# Altium PCB RC_CAR.PcbDoc
Units mm, origin at the board's own origin, x right, y up, seen from the top; angles counter-clockwise.
Board outline 49.71 x 36.04 mm, 2 copper layers (Top Layer, Bottom Layer); 31 components, 33 nets, 98 pads, 82 vias.
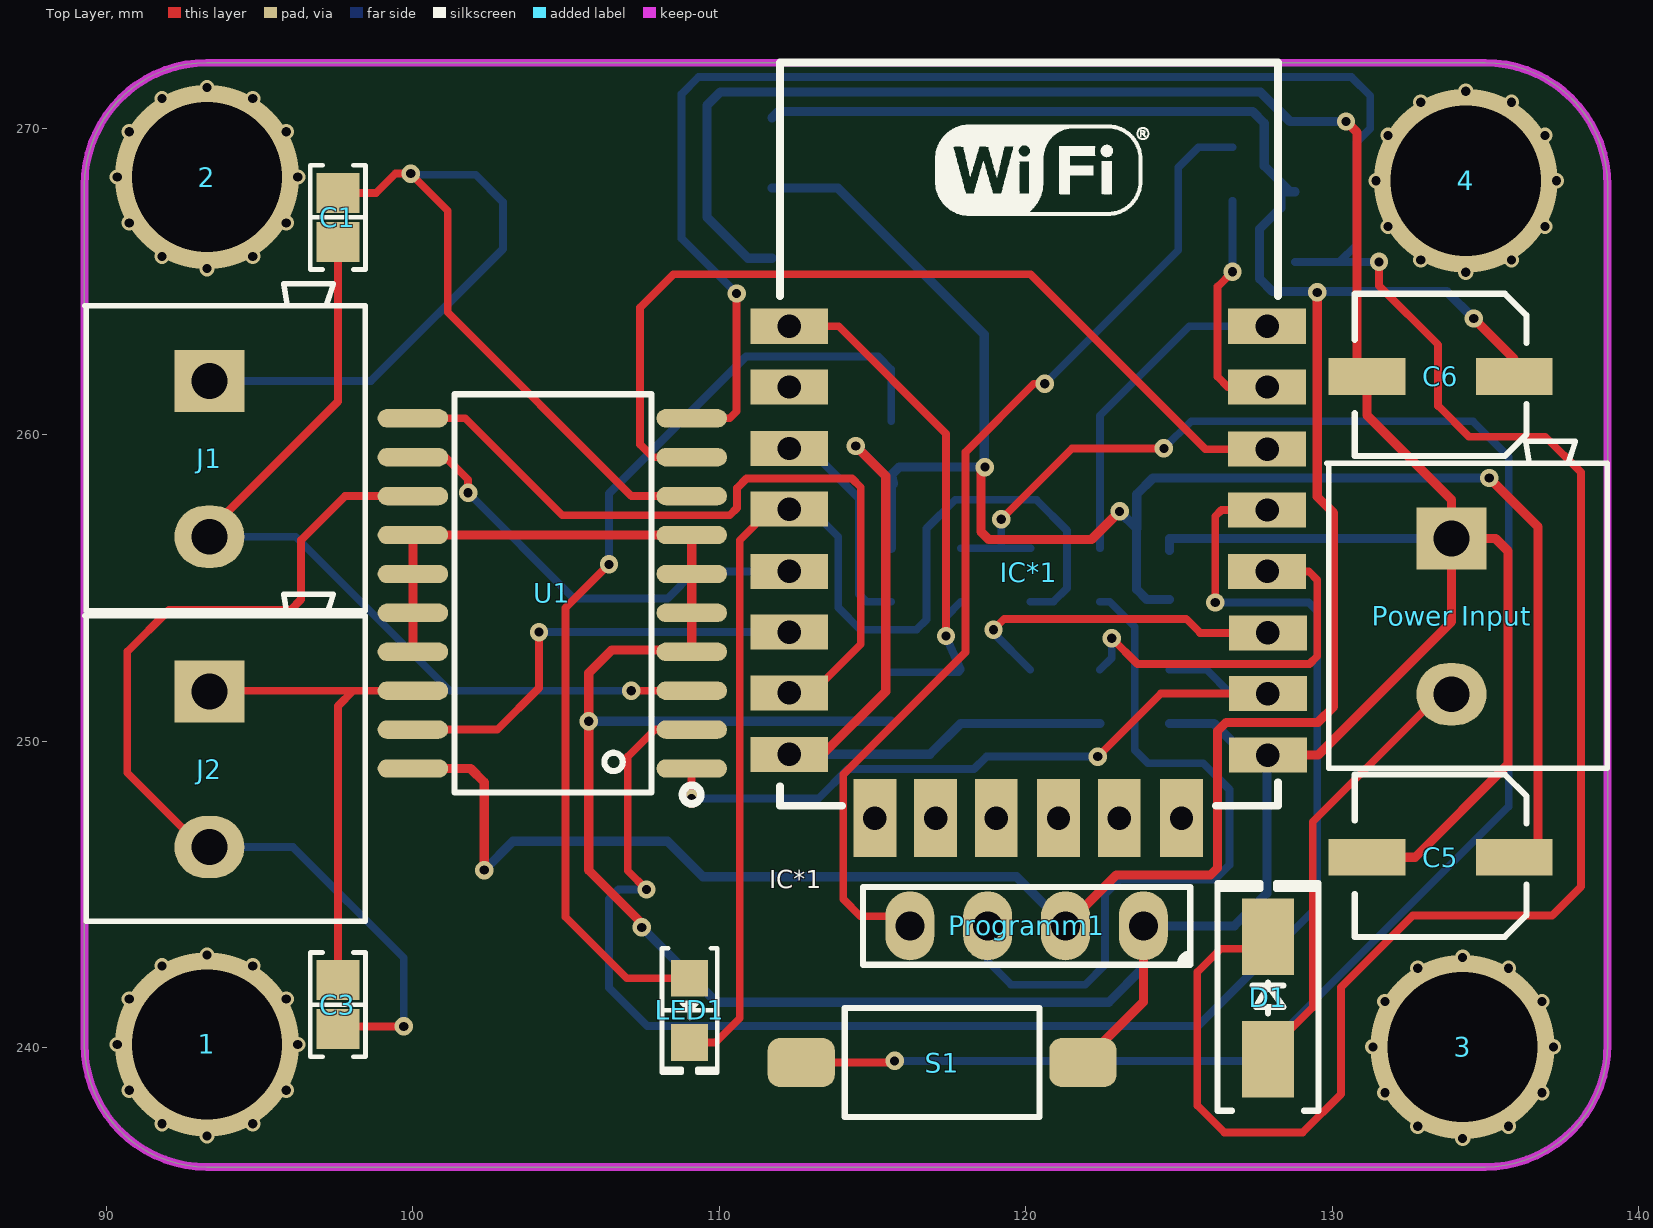
[diagram p0: Top Layer view]
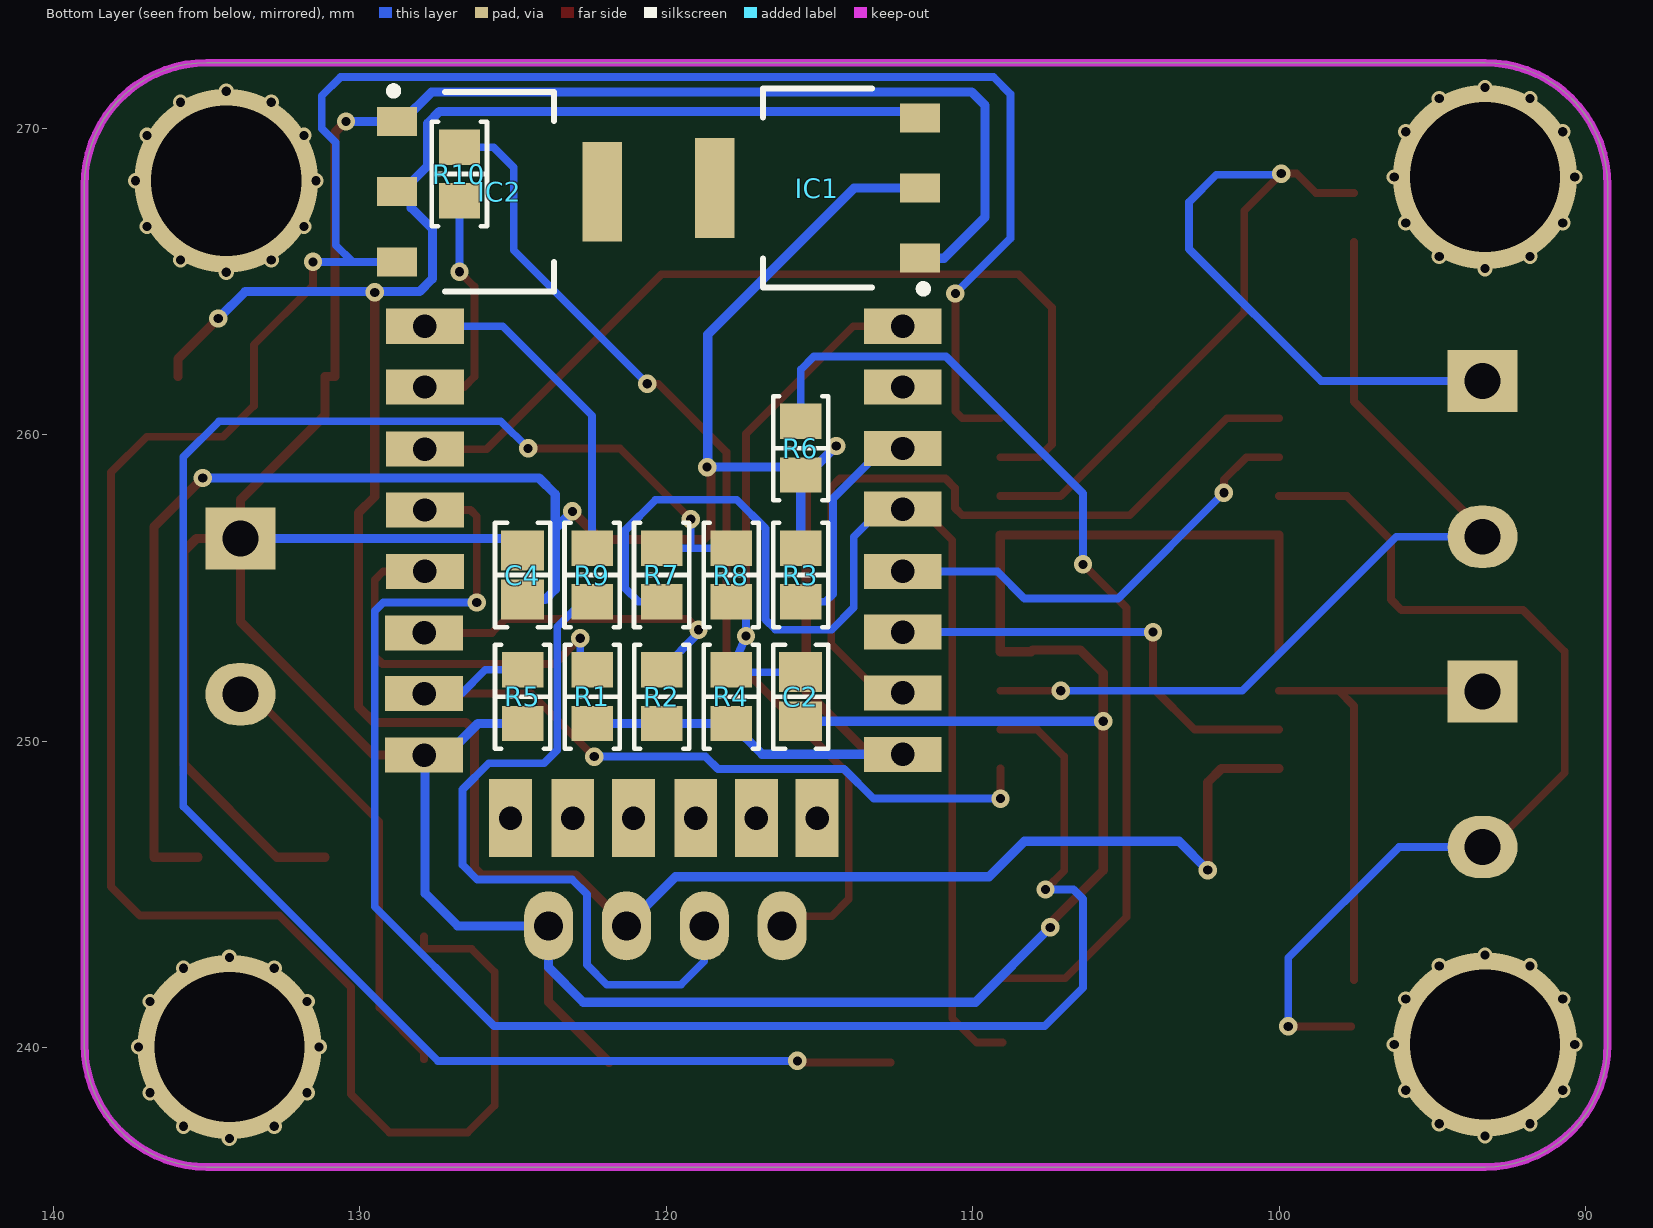
[diagram p1: Bottom Layer view, seen from below]
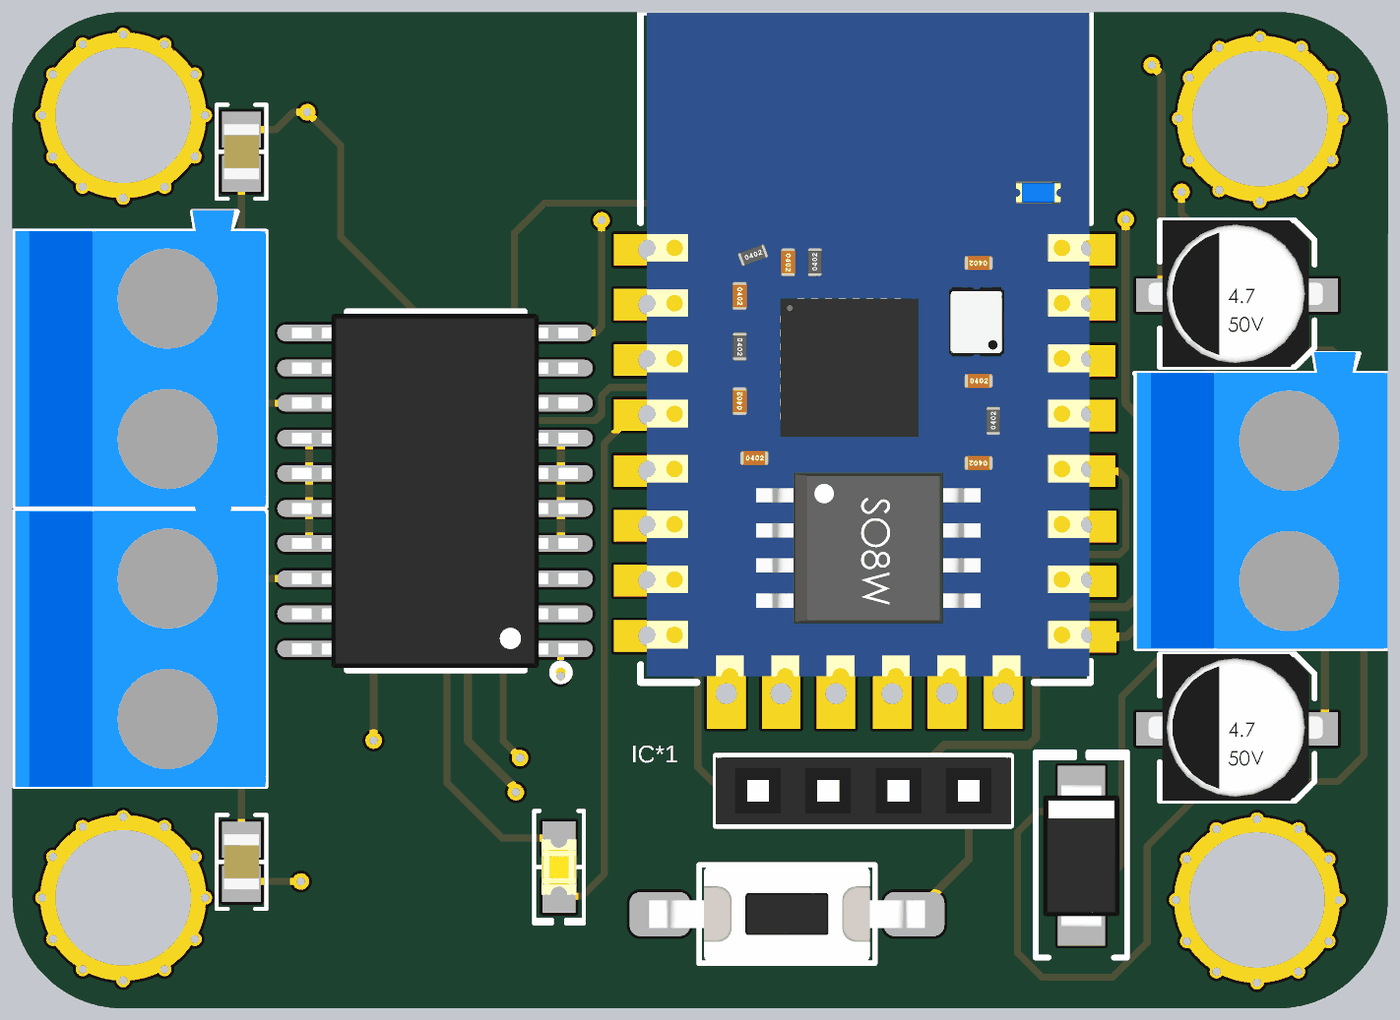
[diagram p2: 3D render of the assembled board from above, using the file's embedded part models]
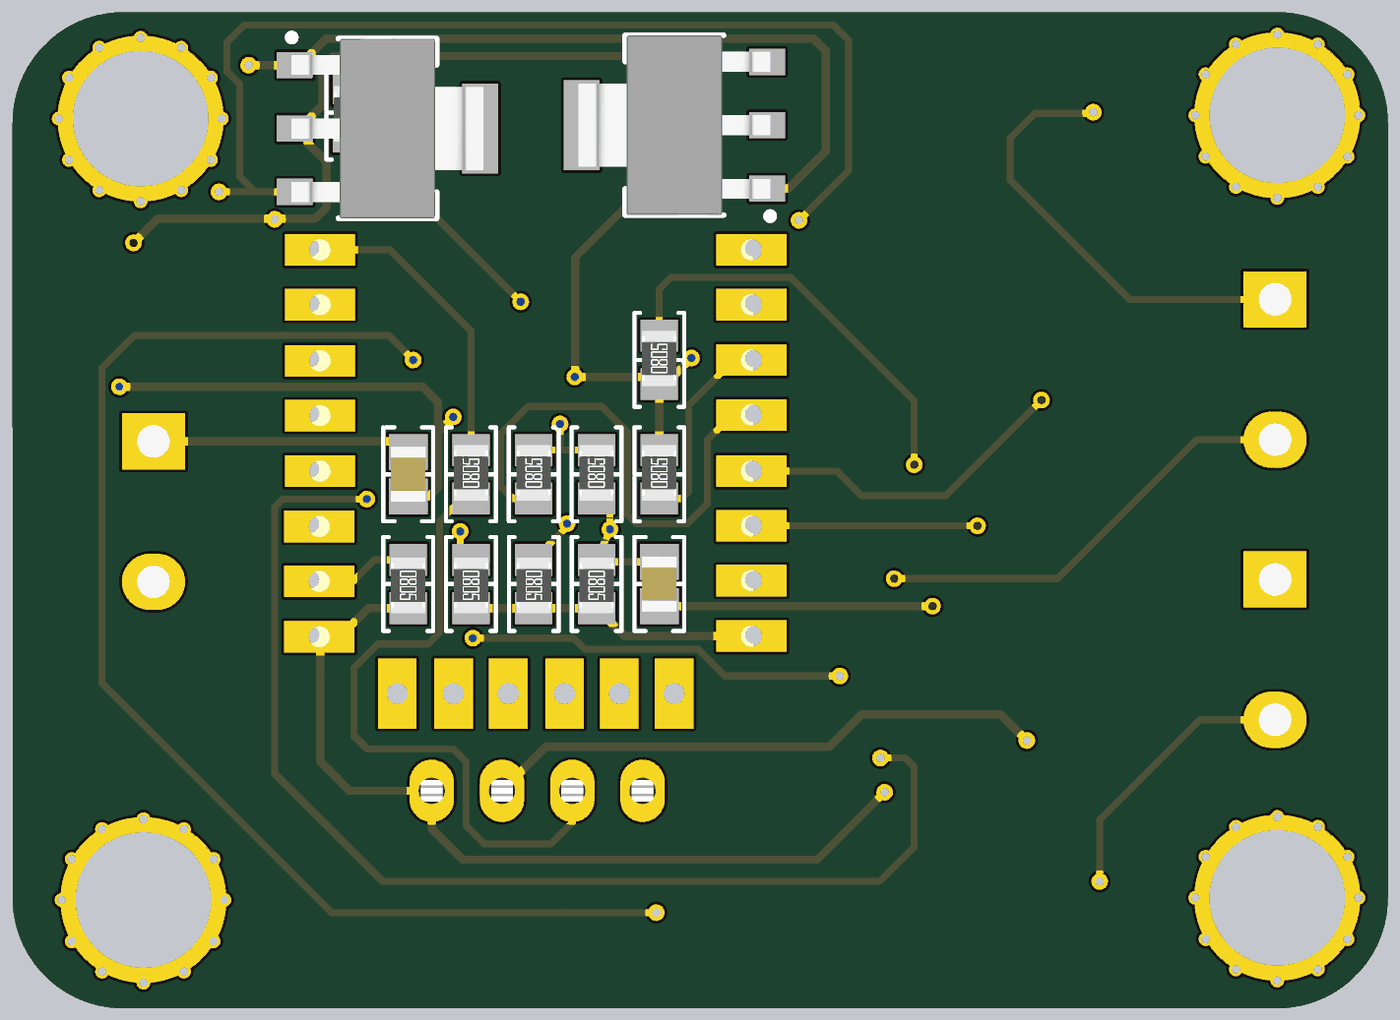
[diagram p3: 3D render of the assembled board from below, using the file's embedded part models]

## Layer stack, top to bottom
Top Solder: solder mask 0.0102, Solder Resist, Dk 3.5
Top Layer: signal copper 0.0356
Dielectric 1: dielectric 0.32, FR-4, Dk 4.8
Bottom Layer: signal copper 0.0356
Bottom Solder: solder mask 0.0102, Solder Resist, Dk 3.5

## Board outline
89.281,240.11 89.281,268.15 cw(c93.281,268.15) 93.281,272.15 134.99,272.15 cw(c134.99,268.15) 138.99,268.15 138.99,240.11 cw(c134.99,240.11) 134.99,236.11 93.281,236.11 cw(c93.281,240.11)

## Design rules (kind name [scope] priority, off if disabled: settings)
Clearance [All] p1: gap=0.2 ignorepadtopadclearanceinfootprint=FALSE
PolygonConnect [All] p1: connectstyle=Relief reliefconductorwidth=0.254 reliefentries=4 polygonreliefangle="90 Angle" airgapwidth=0.254
RoomDefinition RC_CAR [InComponentClass('RC_CAR')] p1: confinementstyle=ConfineIn formatcopy=TRUE lockcomponents=FALSE outline 124.943,58.154 144.247,58.154 144.247,75.807 124.943,75.807
RoutingVias [All] p1: holewidth=0.3 width=0.6 viastyle="Through Hole" minholewidth=0.3 minwidth=0.6 maxholewidth=0.3 maxwidth=0.6
SMDNeckDown [All] p1: percent=50.000
SolderMaskExpansion [All] p1: expansion=0.102
UnConnectedPin [All] p1:
UnRoutedNet [All] p1: checkbadconnections=TRUE
Width [InNet('GND')] p1: maxlimit=0.3 minlimit=0.3 preferedwidth=0.3
Width Width_1 [InNet('VDD5V')] p2: maxlimit=0.3 minlimit=0.3 preferedwidth=0.3
Width Width_2 [InNet('VDD3V3')] p3: maxlimit=0.3 minlimit=0.3 preferedwidth=0.3
Width Width_3 [InNet('No Net')] p4: maxlimit=0.2 minlimit=0.2 preferedwidth=0.2
29 further rules are at their usual default settings.

## Components (designator, comment, footprint, x,y, rotation, side; value= is the part's Value field where it differs from the comment)
1 "Lego" "Lego Hole" 93.281,240.11 r90 top
2 "Lego" "Lego Hole" 93.281,268.417 r90 top
3 "Lego" "Lego Hole" 134.26,240.03 r90 top
4 "Lego" "Lego Hole" 134.36,268.297 r90 top
C1 "100nF" "CAP 0805/2012" 97.554,267.1 r270 top value=0.1uF
C2 "470pF" "CAP 0805/2012" 115.615,251.46 r90 bottom value=0.1uF
C3 "100nF" "CAP 0805/2012" 97.554,241.41 r270 top value=0.1uF
C4 "100nF" "CAP 0805/2012" 124.69,255.43 r270 bottom value=0.1uF
C5 "100uF" "CAP ALUM 5MM" 133.74,246.22 r180 top value=10uF
C6 "10uF" "CAP ALUM 5MM" 133.74,261.91 r180 top
D1 "1N5819/SS14/S4" "DO214AC SMA" 127.91,241.63 r90 top
IC1 "AMS1117 - 3.3V" AMS1117 115.07,268.06 r0 bottom
IC2 "AMS1117 - 5V" AMS1117 125.44,267.94 r180 bottom
IC*1 "ESP8266 ESP-12-E" "ESP8266 ESP-12-E" 128.87,247.14 r0 top
J1 "2 Pin" Socket_Blue_2 93.361,259.22 r270 top
J2 "2 Pin" Socket_Blue_2 93.361,249.09 r270 top
LED1 "RED" "LED 0805/2012 YELLOW" 109.03,241.22 r270 top value=Green
"Power Input" "2 Pin" Socket_Blue_2 133.896,254.08 r270 top
Programm1 "4 Pin" "SAMTEC SSW-104-03-T-S" 120.03,243.98 r180 top
R1 "12K" "RES 0805/2012" 122.42,251.46 r270 bottom value=1K
R2 "12K" "RES 0805/2012" 120.15,251.46 r270 bottom value=1K
R3 "12K" "RES 0805/2012" 115.615,255.43 r90 bottom value=1K
R4 "12K" "RES 0805/2012" 117.88,251.46 r270 bottom value=1K
R5 "12K" "RES 0805/2012" 124.69,251.46 r270 bottom value=1K
R6 "470R" "RES 0805/2012" 115.615,259.57 r90 bottom value=1K
R7 "0(NC)" "RES 0805/2012" 120.152,255.43 r90 bottom value=1K
R8 "470R" "RES 0805/2012" 117.884,255.43 r90 bottom value=1K
R9 "470R" "RES 0805/2012" 122.421,255.43 r90 bottom value=1K
R10 "470R" "RES 0805/2012" 126.75,268.517 r270 bottom value=1K
S1 "But 2 PIN" "TE FSMSMTR" 117.27,239.52 r90 top
U1 "L293DD" SOIC127P1030-20N 104.55,254.83 r180 top

## Footprints (in the part's own frame and the unit in brackets; to place one, negate y for a bottom-side part, rotate by r counter-clockwise, add the part's x,y. Pads: shape width x height; smd on the part's side, far side on the other; paste and mask are expansions set on the pad)
AMS1117 [mm]
  rect 1.3x0.95 smd: 1(-3.35,2.29) 2(-3.35,0) 3(-3.35,-2.29)
  rect 1.3x3.25 smd: ""(3.35,0)
  silkscreen extent -3.58,-3.25 1.78,3.41, body extent -3.47,-3.25 3.47,3.25, height 1.64
"CAP 0805/2012" [mm] "Chip Capacitor, 2-Leads, Body 2.00x1.20mm, IPC Medium Density"
  rect 1.3x1.4 smd: 1(-0.8,0) 2(0.8,0)
  silkscreen extent -1.7,-0.9 1.7,0.9, body extent -1,-0.64 1,0.64, height 1.26
"CAP ALUM 5MM" [mm] "Aluminum Electrolytic Capacitor, Body 6.60x6.60x7.70mm, IPC Low Density"
  rect 2.5x1.2 smd: 1(-2.2,0) 2(2.6,0)
  silkscreen extent -2.6,-2.7 3,2.6, body extent -2.9,-2.7 3.4,2.6, height 5.7
"DO214AC SMA" [mm] "Molded Diode, 2-Leads, Body 4.30x2.60mm, IPC Medium Density"
  rect 2.5x1.7 smd: 1(-2,0) 2(2,0)
  silkscreen extent -3.68,-1.65 3.75,1.65, body extent -2.6,-1.37 2.6,1.37, height 2.4
"ESP8266 ESP-12-E" [mil] "ESP8266 ESP-12-E"
  rect 100x45 hole 30: 1(-653,646) 2(-653,568) 3(-653,489) 4(-653,411) 5(-653,331) 6(-653,253) 7(-653,175) 8(-653,96) 15(-38,95) 16(-38,174) 17(-38,252) 18(-39,331) 19(-39,410) 20(-39,488) 21(-39,568) 22(-39,646)
  rect 55x100 hole 30: 9(-543,14) 10(-465,14) 11(-387,14) 12(-307,14) 13(-229,14) 14(-149,14)
  silkscreen extent -665,30 -25,985, body extent -656,39 -26,983
"LED 0805/2012 YELLOW" [mm] "Chip Diode, 2-Leads, Body 2.00x1.25mm, IPC Medium Density"
  rect 1.2x1.2 smd: 1(-1.05,0) 2(1.05,0)
  silkscreen extent -2.03,-0.9 2.03,0.9, body extent -1,-0.62 1,0.63, height 0.9
"Lego Hole" [mm]
"RES 0805/2012" [mm] "Chip Resistor, 2-Leads, Body 2.00x1.25mm, IPC Medium Density"
  rect 1.15x1.35 smd: 1(-0.875,0) 2(0.875,0)
  silkscreen extent -1.7,-0.9 1.7,0.9, body extent -0.95,-0.62 1.05,0.63, height 0.6
"SAMTEC SSW-104-03-T-S" [mm]
  oval 1.6x2.25 hole 0.95: 1(-3.81,0) 2(-1.27,0) 3(1.27,0) 4(3.81,0)
  silkscreen extent -5.34,-1.27 5.34,1.27, body extent -5.33,-1.21 5.33,1.21, height 8.51
Socket_Blue_2 [mil]
  rect 80x90 hole 46: 1(-100,0)
  oval 80x90 hole 46: 2(100,0)
  silkscreen extent -225,-160 195,200, body extent -227,-157 195,200, height 493
SOIC127P1030-20N [mm] "SOIC, 20-Leads, Body 12.8x7.5mm, Pitch 1.27mm, IPC Medium Density"
  oval 2.3x0.6 smd: 1(-4.55,5.715) 2(-4.55,4.445) 3(-4.55,3.175) 4(-4.55,1.905) 5(-4.55,0.635) 6(-4.55,-0.635) 7(-4.55,-1.905) 8(-4.55,-3.175) 9(-4.55,-4.445) 10(-4.55,-5.715) 11(4.55,-5.715) 12(4.55,-4.445) 13(4.55,-3.175) 14(4.55,-1.905) 15(4.55,-0.635) 16(4.55,0.635) 17(4.55,1.905) 18(4.55,3.175) 19(4.55,4.445) 20(4.55,5.715)
  silkscreen extent -4.85,-6.5 3.19,6.86, body extent -5.16,-6.4 5.16,6.4, height 2.65
"TE FSMSMTR" [mm]
  rrect50% 1.6x2.19 smd: 1(0,4.595) 2(0,-4.595)
  silkscreen extent -1.78,-3.18 1.78,3.17, body extent -1.75,-4.98 1.75,4.98, height 4.42

## Part data
C1 C2 C3 C4: library part Capacitor, "SMT Capacitor"
C5 C6: library part "Polarised Capacitor", "SMT Polarised Capacitor"
D1: library part Diode, "Rectifier Diode"
IC1 IC2: library part AMS1117, Manufacturer_Name="Advanced Monolithic Systems", Manufacturer_Part_Number=ams1117-3.3v, Package=SOT229P700X180-4N, DeviceSetName=AMS1117-3.3V, GateName_1=G$1, Height=1.8mm, LibraryName=ams1117-3.3v, Supplier_Name=RS, SymbolName_1=AMS1117-3.3V
LED1: library part LED, "Chip LED"
R1 R2 R3 R4 R5 R6 R7 R8 R9 R10: library part Resistor, "SMT Resistor"
U1: "IC MOTOR DRIVER PAR 20-SOIC", Package="SOIC-20 STMicroelectronics", Availability=Good, MF=STMicroelectronics, MP=L293DD, Price="3.02 USD"

## Via types
v1: diameter 0.5, hole 0.3, Top Layer to Bottom Layer, 48 vias
v2: diameter 0.6, hole 0.3, Top Layer to Bottom Layer, 30 vias
v3: diameter 6, hole 4.9, Top Layer to Bottom Layer, 4 vias

## Nets (pads, with @x,y where several pads share a name; then routed paths per layer and width w, separated by ;. In a path a pad name is that pad's centre, name@x,y a point inside that pad or via, vN(x,y) a via of type N, cw(c..) or ccw(c..) an arc to the next point about the centre after c; other vN are vias at no path point)
ADC: IC*1.2
EN: IC*1.3 R3.1 | length 6.1
  Bottom Layer w0.254: IC*1.3@113.27,259.214 114.558,257.927 114.558,254.805 114.808,254.555 R3.1
GND: "Power Input.1" C2.1 C4.1 C5.2 C6.2 IC1.1 IC2.1 IC*1.15 Programm1.1 R5.2 S1.2 U1.4 U1.5 U1.6 U1.7 U1.14 U1.15 U1.16 U1.17 | length 154.3
  Top Layer w0.3: U1.17 U1.16 U1.15 U1.14 U1.7 U1.6 U1.5 U1.4 108.1,252.925 108.044,252.981 106.491,252.981 105.74,252.23 v2(105.74,250.66) 105.74,245.796 107.47,244.066 v2(107.47,243.93) ; S1.2 123.84,241.495 Programm1.1 ; IC*1.15 129.54,249.553 133.896,253.909 133.896,256.62 ; v2(130.454,270.23) 130.81,269.874 130.81,261.91 C6.2 131.14,260.642 133.896,257.886 133.896,256.62 ; C5.2 132.707,246.22 135.738,249.25 135.738,256.214 135.331,256.62 133.896,256.62
  Bottom Layer w0.3: v2(105.74,250.66) C2.1 ; v2(107.47,243.93) 109.91,241.49 122.709,241.49 123.84,242.621 Programm1.1 126.81,243.98 127.87,245.04 IC*1.15@127.87,249.553 ; IC1.1 110.937,265.77 109.6,267.107 109.6,270.76 110.036,271.196 127.66,271.196 128.626,270.23 IC2.1 v2(130.454,270.23) ; R5.2 126.145,250.585 127.155,249.575 127.87,249.575 IC*1.15@127.87,249.553 ; C4.1 124.69,256.62 133.896,256.62 ; IC*1.15 IC*1.15@127.87,249.553
GPIO0: IC*1.18 R1.1 | length 12.6
  Top Layer w0.254: v2(122.809,253.365) 123.647,252.527 129.261,252.527 129.515,252.781 129.515,255.268 129.235,255.547 IC*1.18
  Bottom Layer w0.254: R1.1 122.809,252.724 v2(122.809,253.365)
GPIO2: IC*1.17 R2.1 | length 11.1
  Top Layer w0.254: v2(118.948,253.644) 119.301,253.998 125.234,253.998 125.691,253.541 IC*1.17
  Bottom Layer w0.254: v2(118.948,253.644) 118.948,253.537 R2.1
GPIO4: IC*1.19 U1.2 | length 54.2
  Top Layer w0.254: v2(107.623,245.167) 107.01,245.78 107.01,249.504 107.891,250.385 U1.2 ; v2(126.187,254.533) 126.187,257.351 126.39,257.554 IC*1.19
  Bottom Layer w0.254: v2(107.623,245.167) 106.712,245.167 106.401,244.856 106.401,241.96 107.651,240.71 125.623,240.71 129.515,244.602 129.515,254.254 129.235,254.533 v2(126.187,254.533)
GPIO5: IC*1.20 U1.9 | length 29.6
  Top Layer w0.254: U1.9 107.831,259.275 107.417,259.69 107.417,264.16 108.504,265.247 120.158,265.247 125.87,259.535 IC*1.20
GPIO9: IC*1.11
GPIO10: IC*1.12
GPIO12: IC*1.6 U1.19 | length 14.7
  Top Layer w0.254: U1.19 102.755,250.385 104.115,251.745 v2(104.115,253.566)
  Bottom Layer w0.254: v2(104.115,253.566) IC*1.6
GPIO13: IC*1.7 U1.11 | length 25.2
  Top Layer w0.254: U1.11 101.705,260.545 104.872,257.378 110.338,257.378 110.577,257.617 110.577,258.267 110.89,258.58 114.33,258.58 114.62,258.29 114.62,253.17 113.36,251.91 113.36,251.585 IC*1.7
GPIO14: IC*1.5 U1.12 | length 14.8
  Top Layer w0.254: U1.12 101.065,259.275 101.803,258.537 v2(101.803,258.115)
  Bottom Layer w0.254: v2(101.803,258.115) 105.258,254.66 108.308,254.66 109.195,255.547 IC*1.5
GPIO15: IC*1.16 R5.1 U1.1 | length 24.8
  Top Layer w0.254: v2(109.093,248.133) 109.093,249.115 U1.1 ; v2(122.352,249.504) 124.407,251.56 IC*1.16
  Bottom Layer w0.254: v2(109.093,248.133) 113.233,248.133 114.198,249.098 118.313,249.098 118.72,249.504 v2(122.352,249.504) ; R5.1 125.908,252.335 126.683,251.56 IC*1.16
GPIO16: IC*1.4 LED1.2 R7.1 | length 39.1
  Top Layer w0.254: LED1.2 109.868,240.17 110.668,240.97 110.668,256.561 111.88,257.773 111.88,257.579 IC*1.4
  Bottom Layer w0.254: IC*1.4 112.979,257.579 113.881,256.678 113.881,254.368 114.605,253.644 116.434,253.644 116.764,253.975 116.764,256.946 117.701,257.883 120.348,257.883 121.35,256.881 121.35,255.001 120.904,254.555 R7.1
M1+: C1.2 J1.2 U1.3 | length 29.2
  Top Layer w0.254: J1.2 93.361,256.901 97.554,261.094 C1.2 ; v2(107.125,251.655) U1.3
  Bottom Layer w0.254: J1.2 96.18,256.68 101.205,251.655 v2(107.125,251.655)
M1-: C1.1 J1.1 U1.8 | length 34.3
  Top Layer w0.254: C1.1 98.8,267.9 99.43,268.53 v2(99.93,268.53) 101.14,267.32 101.14,264.002 107.137,258.005 U1.8
  Bottom Layer w0.254: J1.1 98.63,261.76 102.94,266.07 102.94,267.6 102.05,268.49 v2@99.97,268.49
M2+: C3.2 J2.2 U1.13 | length 32.3
  Top Layer w0.254: J2.2 93.11,246.55 90.68,248.98 90.68,252.93 92.04,254.29 96.01,254.29 96.35,254.63 96.35,256.57 97.785,258.005 U1.13 ; C3.2@97.644,240.7 v2(99.7,240.7)
  Bottom Layer w0.254: J2.2 96.09,246.55 99.7,242.94 v2(99.7,240.7)
M2-: C3.1 J2.1 U1.18 | length 16.3
  Top Layer w0.254: J2.1 93.386,251.655 98.054,251.655 ; C3.1 97.554,251.155 98.054,251.655 ; U1.18 98.054,251.655
NetLED1_1: LED1.1 R6.2 | length 32.2
  Top Layer w0.254: v2(106.401,255.778) 104.978,254.356 104.978,244.272 106.98,242.27 LED1.1
  Bottom Layer w0.254: v2(106.401,255.778) 106.401,258.089 110.871,262.56 115.189,262.56 115.615,262.134 R6.2
NetProgramm1_3: Programm1.3 R9.1 | length 23.9
  Bottom Layer w0.254: Programm1.3 118.76,242.824 119.524,242.06 121.94,242.06 122.59,242.71 122.59,245.01 123.07,245.49 126.17,245.49 126.65,245.97 126.65,248.43 125.79,249.29 123.99,249.29 123.56,249.72 123.56,253.74 122.745,254.555 R9.1
NetProgramm1_4: Programm1.4 R10.1 | length 33.4
  Top Layer w0.254: Programm1.4 116.22,244.297 114.605,244.297 114.046,244.856 114.046,248.92 118.034,252.908 118.034,259.442 120.263,261.671 v2(120.625,261.671)
  Bottom Layer w0.254: v2(120.625,261.671) 124.98,266.026 124.98,268.73 125.642,269.392 R10.1
NetR7_2: R7.2 R8.2 S1.1 | length 59.5
  Top Layer w0.254: S1.1 115.67,239.52 v2(115.722,239.573) ; v2(119.202,257.251) 121.514,259.563 v2(124.511,259.563)
  Bottom Layer w0.254: v2(115.722,239.573) 127.457,239.573 135.763,247.879 135.763,259.283 134.595,260.452 125.4,260.452 v2(124.511,259.563) ; R8.2 119.202,256.305 ; v2(119.202,257.251) 119.202,256.305 ; R7.2 119.202,256.305
nRST: C2.2 IC*1.1 R4.1 R8.1 | length 18
  Top Layer w0.254: IC*1.1 113.894,263.548 117.399,260.043 v2(117.399,253.441)
  Bottom Layer w0.254: C2.2 117.805,252.26 R4.1 v2@117.39,253.437 ; v2(117.399,253.441) 117.399,254.07 R8.1
RXD0: IC*1.21 R10.2 | length 7.7
  Top Layer w0.254: v2(126.75,265.328) 126.263,264.842 126.263,261.897 126.594,261.567 IC*1.21
  Bottom Layer w0.254: v2(126.75,265.328) R10.2
SPI_CLK: IC*1.14
SPI_INT: IC*1.13
SPI_MISO: IC*1.10
SPI_MOSI: IC*1.9
TXD0: IC*1.22 R9.2 | length 11
  Bottom Layer w0.254: R9.2 122.421,260.629 125.34,263.548 IC*1.22
V_RAW: "Power Input.2" D1.1 | length 14.6
  Top Layer w0.254: D1.1 127.91,239.86 129.37,241.32 129.37,247.38 133.53,251.54 133.896,251.54
VDD3V3: C4.2 C5.1 IC1.2 IC*1.8 R1.2 R2.2 R3.2 R4.2 R6.1 | length 82.3
  Top Layer w0.3: IC*1.8 113.38,249.578 115.43,251.629 115.43,258.661 v2(114.452,259.639) ; v2(118.669,258.953) 118.542,258.826 118.542,256.845 118.796,256.591 122.149,256.591 v2(123.063,257.505) ; v2(135.128,258.597) 136.72,257.005 136.72,246.22 C5.1 C5.1@135.28,246.22
  Bottom Layer w0.3: IC1.2 113.87,268.06 118.65,263.28 v2@118.65,258.953 ; IC*1.8 116.873,249.578 R4.2 R2.2 R1.2 ; v2(114.452,259.639) R6.1@115.615,258.476 ; R3.2 R6.1@115.615,258.476 ; v2(118.669,258.953) v2@118.65,258.953 ; v2(123.063,257.505) 123.62,256.948 123.62,254.962 123.952,254.63 C4.2 ; 123.622,256.946 123.622,258.064 124.155,258.597 v2(135.128,258.597) ; R6.1@115.615,258.476 115.681,258.41 R6.1 ; R6.1@115.615,258.476 R6.1 ; R6.1 115.873,258.953 v2@118.65,258.953
VDD5V: C6.1 IC1.3 IC2.2 Programm1.2 U1.20 | length 86.4
  Top Layer w0.3: U1.20 101.879,249.115 102.33,248.664 v2(102.33,245.8) ; Programm1.2 122.963,245.643 126.035,245.643 126.263,245.872 126.263,250.342 126.543,250.622 129.54,250.622 130.048,251.13 130.048,257.454 129.515,257.988 v2(129.515,264.655) ; v2(134.62,263.8) 135.94,262.48 C6.1
  Bottom Layer w0.3: v2(102.33,245.8) 103.27,246.74 108.31,246.74 109.47,245.58 119.7,245.58 Programm1.2 ; IC1.3 111.93,270.56 127.4,270.56 127.787,270.172 127.787,268.783 IC2.2@128.63,267.94 ; IC2.2 IC2.2@128.63,267.94 ; v2(134.62,263.8) 133.74,264.68 128.055,264.68 127.635,265.1 127.635,266.725 128.321,267.411 128.321,267.94 IC2.2@128.63,267.94
VIN: D1.2 IC2.3 U1.10 | length 94.4
  Top Layer w0.254: U1.10 110.338,260.545 110.566,260.774 v2(110.566,264.617) ; D1.2 127.91,243.23 126.36,243.23 125.6,242.47 125.6,238.12 126.48,237.24 129.04,237.24 130.29,238.49 130.29,241.98 132.63,244.32 137.18,244.32 138.12,245.26 138.12,258.78 136.957,259.944 134.466,259.944 133.46,260.95 133.46,262.94 131.53,264.87 v2(131.53,265.65)
  Bottom Layer w0.254: v2(110.566,264.617) 108.77,266.413 108.77,271.13 109.318,271.678 130.632,271.678 131.242,271.069 131.242,270.002 130.785,269.545 130.785,266.192 130.243,265.65 ; IC2.3 130.243,265.65 ; v2(131.53,265.65) 130.243,265.65
pads on no net: IC1. IC2.
copper on no net:
  other v1: 134.26,237.041 93.281,237.121 132.794,237.441 135.755,237.441 91.815,237.521 94.775,237.521 131.722,238.536 136.849,238.536 90.743,238.616 95.869,238.616 131.33,240.03 137.22,240.03 90.351,240.11 96.241,240.11 131.722,241.511 136.849,241.511 90.743,241.591 95.869,241.591 132.794,242.594 135.755,242.594 91.815,242.674 94.775,242.674 134.26,242.951 93.281,243.031 134.36,265.308 93.281,265.428 132.894,265.709 135.855,265.709 91.815,265.829 94.775,265.829 131.822,266.803 136.949,266.803 90.743,266.923 95.869,266.923 131.43,268.297 137.32,268.297 90.351,268.417 96.241,268.417 131.822,269.778 136.949,269.778 90.743,269.898 95.869,269.898 132.894,270.861 135.855,270.861 91.815,270.981 94.775,270.981 134.36,271.218 93.281,271.338
  other v3: 134.26,240.03 93.281,240.11 134.36,268.297 93.281,268.417

## Keep-outs
Keep-Out Layer:
  the board outline again, w0.254

## Silkscreen, mask and mechanical layers (free items; w line width, h text height)
Top Overlay:
  region: 200.59,260.19
  text "NIOMATIC INC © 2018" at 78.261,246.18 h1.52 r90
Top Solder:
  drawing of 379 lines, arcs and shapes, not listed
  text "NIOT Kit" at 76.481,246.18 h2 r90

## Text inside footprints (layer, text, board x,y; h text height)
IC*1: Mechanical 13 "ANTENNA AREA" at 112.285,271.539 h0.25; Mechanical 13 "CUTOUT POLYGON" at 112.285,271.031 h0.25